# Altium PCB PCB3.PcbDoc
Units mm, origin at the board's own origin, x right, y up, seen from the top; angles counter-clockwise.
Board outline 36.2 x 47.87 mm, 2 copper layers (Top Layer, Bottom Layer); 21 components, 17 nets, 72 pads, 18 vias.
Unrouted connection lines stored in the file: 1.
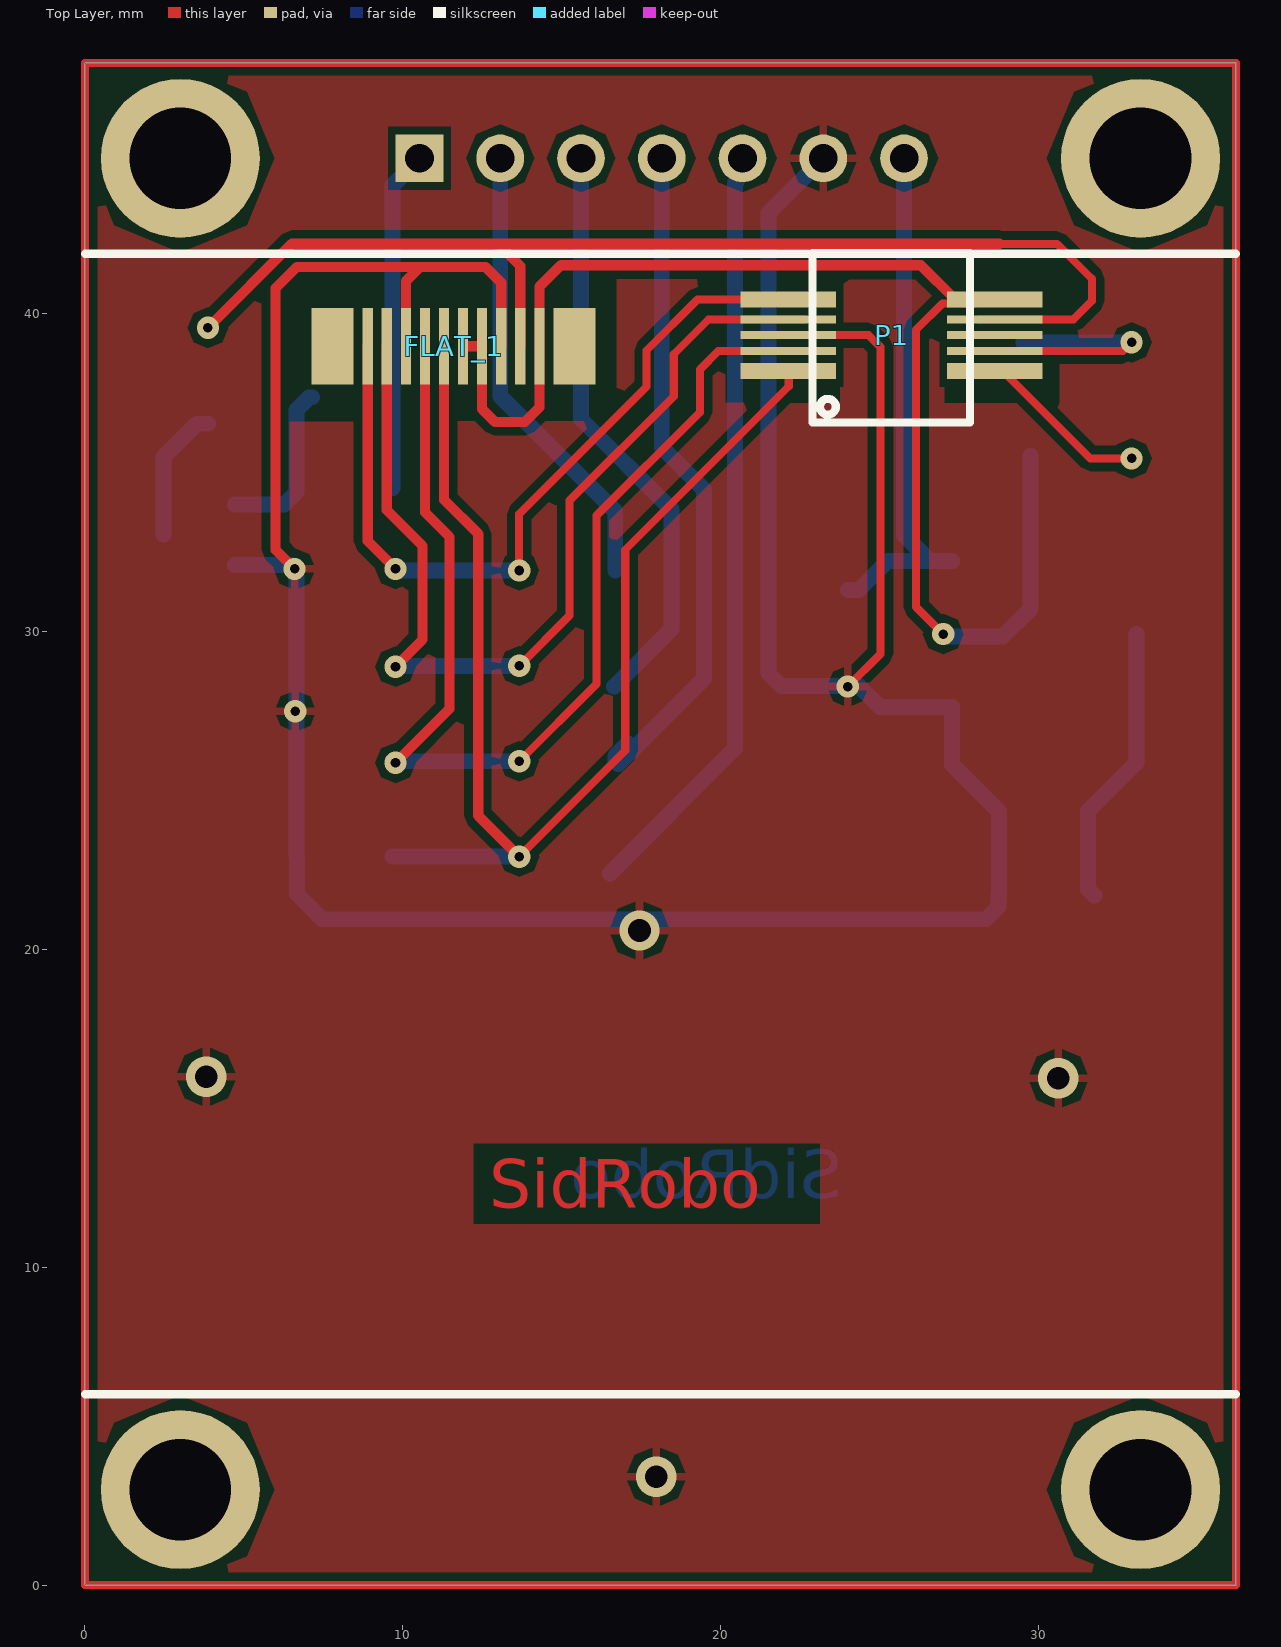
[diagram p0: Top Layer view]
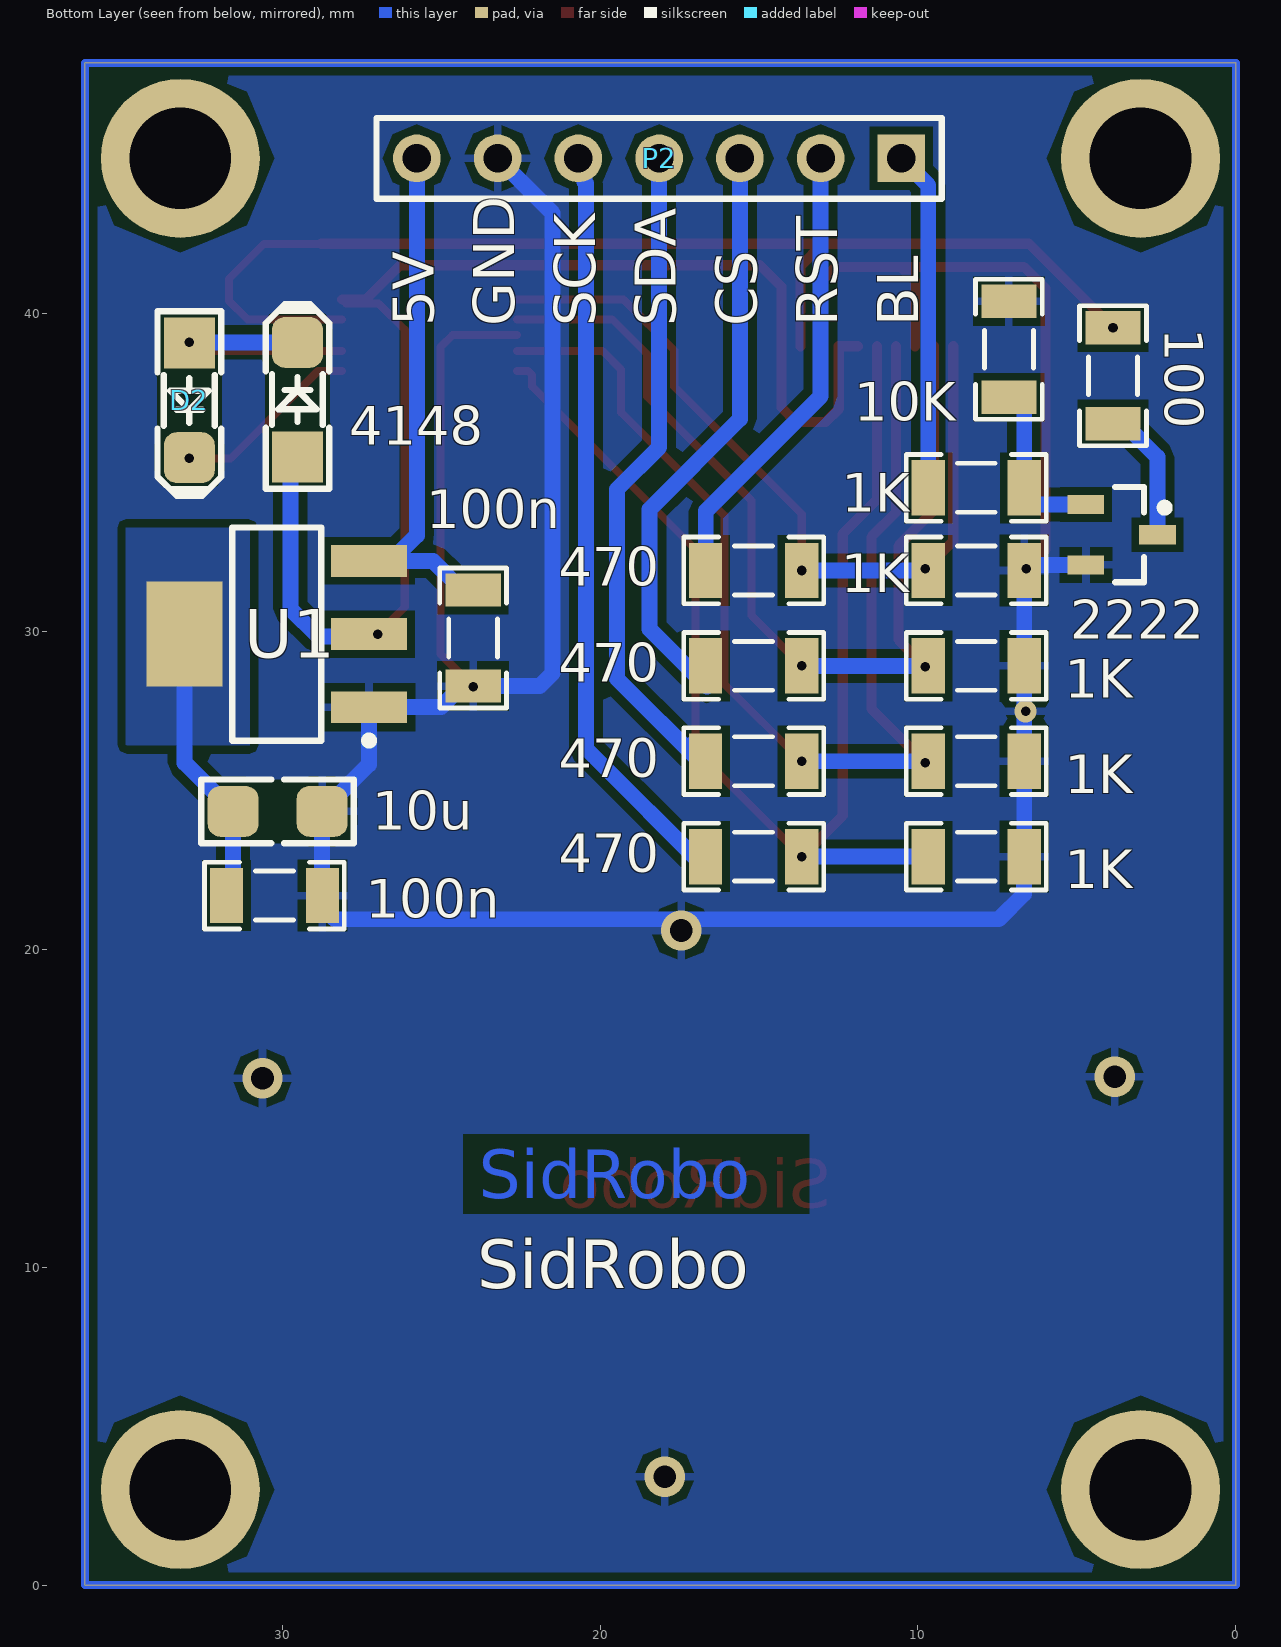
[diagram p1: Bottom Layer view, seen from below]
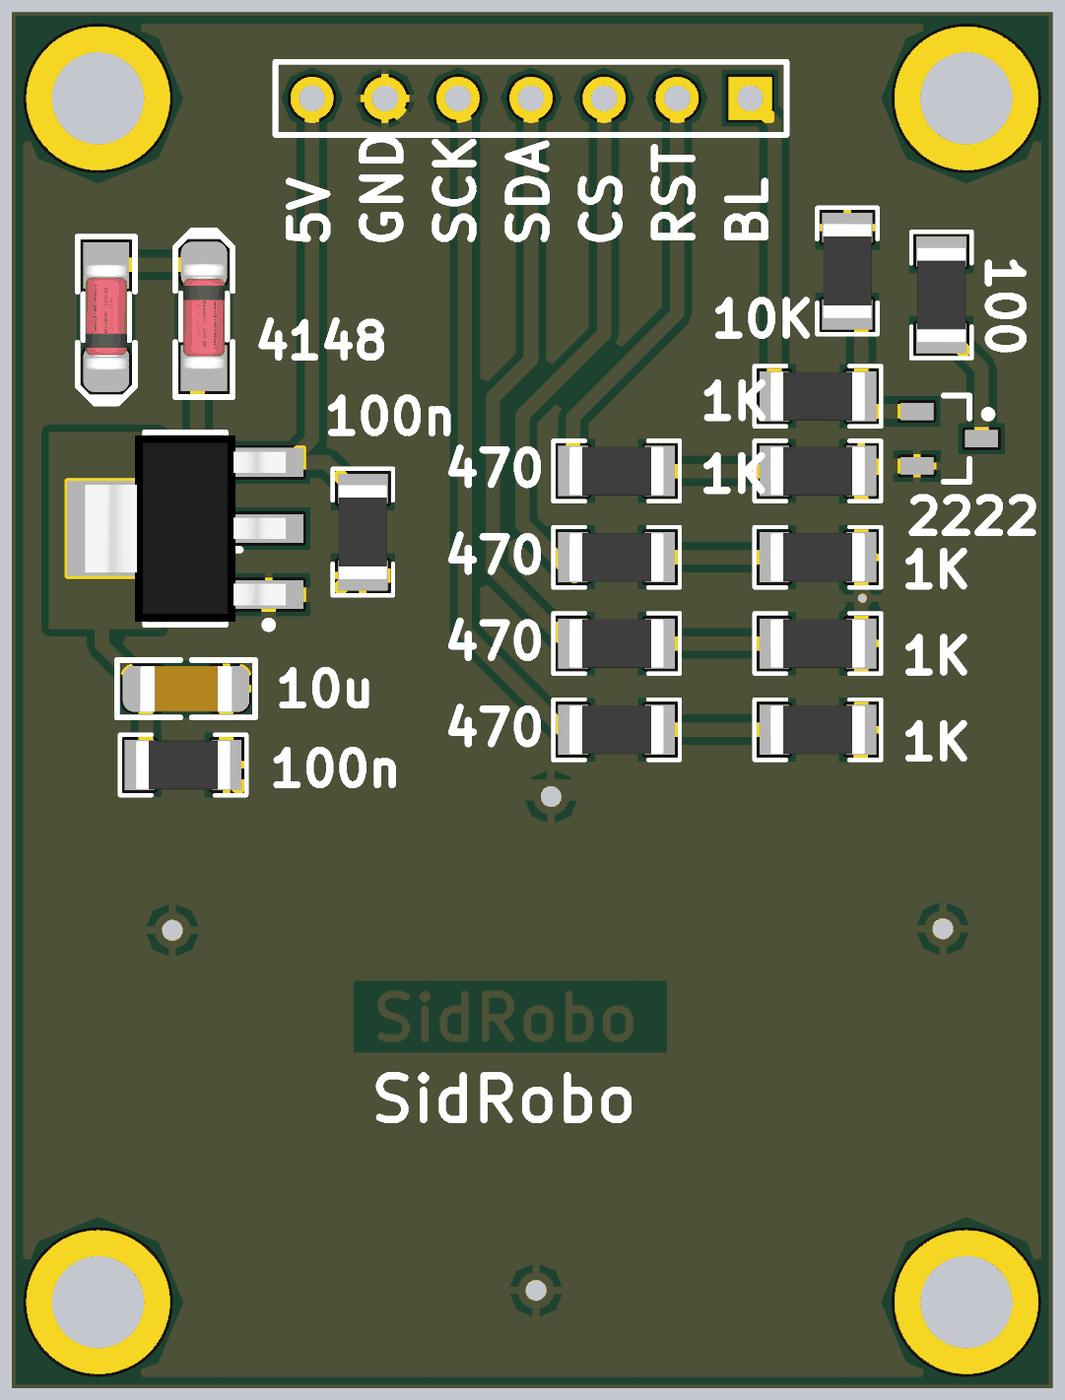
[diagram p2: 3D render of the assembled board from below, using the file's embedded part models]

## Layer stack, top to bottom
Top Solder: solder mask 0.0102, Solder Resist, Dk 3.5
Top Layer: signal copper 0.0356
Dielectric 1: dielectric 0.32, FR-4, Dk 4.8
Bottom Layer: signal copper 0.0356
Bottom Solder: solder mask 0.0102, Solder Resist, Dk 3.5

## Board outline
0,6 0,47.871 36.2,47.871 36.2,0 0,0

## Design rules (kind name [scope] priority, off if disabled: settings)
Clearance [All] p1: gap=0.24 ignorepadtopadclearanceinfootprint=FALSE
ComponentClearance [All] p1: gap=0.25 collisioncheckmode=3 verticalgap=0 showdistances=TRUE
PolygonConnect [All] p1: connectstyle=Relief reliefconductorwidth=0.254 reliefentries=4 polygonreliefangle="90 Angle" airgapwidth=0.254
RoutingVias [All] p1: holewidth=0.711 width=1.27 viastyle="Through Hole" minholewidth=0.711 minwidth=1.27 maxholewidth=0.711 maxwidth=1.27
SolderMaskExpansion [All] p1: expansion=0.102 istentingtop=FALSE
Width [All] p1: maxlimit=0.6 minlimit=0.254 preferedwidth=0.32
29 further rules are at their usual default settings.

## Classes and differential pairs
component class Sheet2: 1K 10u 100 100n 470 2222 4148 D2 P1 P2 U1

## Components (designator, comment, footprint, x,y, rotation, side; value= is the part's Value field where it differs from the comment)
1K "1k" IND1206 8.167,34.51 r180 bottom (schematic designator R10)
1K "1k" IND1206 8.167,31.909 r0 bottom (schematic designator R4)
1K "1k" IND1206 8.167,28.909 r0 bottom (schematic designator R3)
1K "1k" IND1206 8.167,25.909 r0 bottom (schematic designator R2)
1K "1k" IND1206 8.167,22.909 r0 bottom (schematic designator R1)
10K "1k" IND1206 7.14,38.867 r270 bottom (schematic designator R10)
10u "Cap" C1206 30.142,24.335 r0 bottom value=10uF (schematic designator C3)
100 "100" IND1206 3.867,38.034 r90 bottom (schematic designator R8)
100n "Cap" IND1206 30.242,21.684 r0 bottom value=100nF (schematic designator C2)
100n "Cap" IND1206 23.992,29.784 r90 bottom value=100nF (schematic designator C1)
470 "470" IND1206 15.167,31.909 r180 bottom (schematic designator R9)
470 "470" IND1206 15.167,28.909 r180 bottom (schematic designator R7)
470 "470" IND1206 15.167,25.91 r180 bottom (schematic designator R6)
470 "470" IND1206 15.167,22.909 r180 bottom (schematic designator R5)
2222 "2N2222A" SOT23_N 3.592,33.034 r180 bottom (schematic designator Q1)
4148 "1N4148" D_SOD80 29.517,37.284 r90 bottom (schematic designator D1)
D2 "1N4148" D_SOD80 32.917,37.259 r270 bottom
FLAT_1 "1202" 1202_LCD 1.406,36.865 r0 top (schematic designator FLAT)
P1 "1200" 1200_1100_LCD 21.617,41.059 r0 top
P2 "Header 7" HDR1X7 10.522,44.872 r0 bottom
U1 "LM1117IMP-x.x" MP04A_N 30.167,29.909 r0 bottom

## Footprints (in the part's own frame and the unit in brackets; to place one, negate y for a bottom-side part, rotate by r counter-clockwise, add the part's x,y. Pads: shape width x height; smd on the part's side, far side on the other; paste and mask are expansions set on the pad)
1200_1100_LCD [mm]
  rect 3x0.5 smd: 1(0.5,-2.875) 5(0.5,-0.625) 6(7,-0.625) 10(7,-2.875)
  rect 3x0.254 smd: 2(0.5,-2.25) 3(0.5,-1.75) 4(0.5,-1.25) 7(7,-1.25) 8(7,-1.75) 9(7,-2.25)
  silkscreen extent 1.27,-4.5 6.22,0.83
1202_LCD [mm]
  rect 1.32x2.4 smd: 1(6.386,2.094) 12(13.986,2.094)
  rect 0.32x2.4 smd: 2(7.486,2.094) 3(8.086,2.094) 4(8.686,2.094) 5(9.286,2.094) 6(9.886,2.094) 7(10.486,2.094) 8(11.086,2.094) 9(11.686,2.094) 10(12.286,2.094) 11(12.886,2.094)
C1206 [mm] "CHIP Capacitor, 3.2X1.6mm, 1206"
  rrect50% 1.6x1.6 smd mask+0.075: 1(-1.4,0) 2(1.4,0)
  Top Layer pour cut-out: -0.8,1 -0.8,-1 0.8,-1 0.8,1
  silkscreen extent -2.4,-1 2.4,1, body extent -1.6,-0.8 1.6,0.8, height 1
D_SOD80 [mm] "SOD-80 MINI-MELF 3.6X1.6mm, LL-34, LL4148"
  rect 1.6x1.6 smd: 1(-1.8,0)
  rrect50% 1.6x1.6 smd: 2(1.8,0)
  Top Layer pour cut-out: -1.016,1.016 1.016,1.016 1.016,-1.016 -1.016,-1.016
  silkscreen extent -2.8,-1 3,1, body extent -1.85,-0.8 1.85,0.8, height 2
HDR1X7 [mm] "Connector; Header; 7 Position"
  rect 1.5x1.5 hole 0.9: 1(0,0)
  round 1.5 hole 0.9: 2(2.54,0) 3(5.08,0) 4(7.62,0) 5(10.16,0) 6(12.7,0) 7(15.24,0)
  silkscreen extent -1.27,-1.27 16.51,1.27
IND1206 [mm] "Chip Inductor, 2-Leads, Body 3/20x1/60mm, IPC Medium Density DESIGNER:ABBAS BASEREH"
  rect 1.04x1.74 smd: 1(-1.51,0) 2(1.51,0)
  silkscreen extent -2.2,-1.05 2.2,1.05, body extent -1.65,-0.85 1.65,0.85, height 0.94
MP04A_N [mm] "SOT223, 4-Leads, Body 6.5x3.5mm, Pitch 2.3mm, Lead Span 7mm, IPC Medium Density"
  rect 2.4x1 smd: 1(-2.9,2.3) 2(-2.9,0) 3(-2.9,-2.3)
  rect 2.4x3.3 smd: 4(2.9,0)
  silkscreen extent -3.02,-3.35 1.4,3.47, body extent -3.49,-3.24 3.49,3.24, height 1.64
SOT23_N [mm] "SOT23, 3-Leads, Body 2.9x1.3mm, Pitch 0.95mm, Lead Span 2.3mm - Reverse Pinning, IPC Medium Density"
  rect 1.15x0.6 smd: 1(1.125,0) 2(-1.125,-0.95) 3(-1.125,0.95)
  silkscreen extent -0.2,-1.5 1.47,1.5, body extent -0.7,-1.5 0.7,1.5, height 1.1

## Part data
1K 1K 1K 1K 1K 10K 100 470 470 470 470: library part Res1, "Resistor", LatestRevisionDate=17-Jul-2002, LatestRevisionNote="Re-released for DXP Platform.", PackageDescription="Axial Device, Thru-Hole; 2 Leads; 0.3 in Pin Spacing", PackageReference=AXIAL-0.3, Published=8-Jun-2000, Publisher="Altium Limited"
10u 100n 100n: "Capacitor", LatestRevisionDate=17-Jul-2002, LatestRevisionNote="Re-released for DXP Platform.", PackageDescription="Radial Cap, Thru-Hole; 2 Leads; 0.3 in Pin Spacing", PackageReference=RAD-0.3, Published=8-Jun-2000, Publisher="Altium Limited"
2222: library part NPN_2N2222A_TO92, "BJT, NPN, 40v, 0.6A, THD, TO92", =http://www.chila.ir, MANF=DIOTEC, MANF_P#=2N2222A, PARAM="0.6A, hFE100~300", PARAM2="40v, 625mW"
4148 D2: library part DIODE_SMD_1N4148, "DIODE, FAST SWTICHING, 0.3A, 0.5W", =http://www.chila.ir, ASSEMBLY=ASSEMBLY, DESC=DESCRIPTION, MANF=MANF, MANF_P#=1N4148, PARAM=75V, PARAM2="300mA, 0.5W", PRICE=PRICE
FLAT_1: library part "Header 12", "Header, 12-Pin", LatestRevisionDate=17-Jul-2002, LatestRevisionNote="Re-released for DXP Platform.", Publisher="Altium Limited"
P1: library part "Header 10", "Header, 10-Pin", LatestRevisionDate=17-Jul-2002, LatestRevisionNote="Re-released for DXP Platform.", Publisher="Altium Limited"
P2: "Header, 7-Pin", LatestRevisionDate=17-Jul-2002, LatestRevisionNote="Re-released for DXP Platform.", Publisher="Altium Limited"
U1: "x.x Volt, 800mA Low-Dropout Linear Regulator, 4-pin SOT-223", Manufacturer="National Semiconductor", PackageTopMarking=XYTT*N05B, PartNumber=LM1117IMP-3.3, PowerWise=N, Supplier Part Number 1=7614123, Code_IPC=SOT223-4, Code_JEDEC=TO-261-AA, ComponentLink1Description="LM1117 Datasheet", ComponentLink1URL=http://www.national.com/ds/LM/LM1117.pdf, ComponentLink2Description="LM1117 Web Page", ComponentLink2URL=http://www.national.com/pf/LM/LM1117.html, ComponentLink3Description="MP04A Package Page", ComponentLink3URL=http://www.national.com/packaging/folders/mp04a.html, CompType="LDO IC", DatasheetVersion=Apr-2006, PackageDescription="Molded SOT-223, 6.50 x 3.56 x 1.6mm Body, 4 Lead, 2.3mm Pitch", PackageReference=MP04A, PackageVersion="revB, Apr-2003", PinCount=4, Published=4-Dec-2008, Publisher="Altium Limited", RoHS=N, Supplier 1=Farnell

## Free pads (board coordinates)
  round 5 hole 3.2: 1(3,44.872) 2(33.2,44.872) 3(3,3) 4(33.2,3)

## Via types
v1: diameter 0.7, hole 0.3, Top Layer to Bottom Layer, tented top, 13 vias
v2: diameter 1.27, hole 0.711, Top Layer to Bottom Layer, tented both sides, 4 vias
v3: diameter 0.7, hole 0.3, Top Layer to Bottom Layer, tented both sides, 1 vias

## Nets (pads, with @x,y where several pads share a name; then routed paths per layer and width w, separated by ;. In a path a pad name is that pad's centre, name@x,y a point inside that pad or via, vN(x,y) a via of type N, cw(c..) or ccw(c..) an arc to the next point about the centre after c; other vN are vias at no path point)
5V: 100n.2@23.992,31.294 P2.7 U1.3 | length 16.6
  Bottom Layer w0.5: 100n.2@23.992,31.294 24.342,31.294 25.257,32.209 U1.3@26.567,32.209 ; P2.7 25.762,33.015 U1.3@26.567,32.209 ; U1.3 U1.3@26.567,32.209
+2.5V: D2.2 P1.10 | length 5.9
  Top Layer w0.254: P1.10@28.117,38.184 28.867,38.184 31.617,35.434 v1(32.917,35.434)
+2.8V: 4148.2 D2.1 P1.9 | length 8.3
  Top Layer w0.254: P1.9@28.117,38.809 32.642,38.809 v1(32.917,39.084)
  Bottom Layer w0.5: 4148.2 v1(32.917,39.084)
BL: 1K.1@9.677,34.51 P2.1 | length 10.7
  Bottom Layer w0.5: 1K.1@9.677,34.51 9.677,44.026 P2.1
CS: 1K.2@9.677,28.909 470.2@13.657,28.909 FLAT_1.3 P1.4 | length 31.2
  Top Layer w0.254: v1(13.657,28.909) 15.242,30.494 15.242,34.109 18.517,37.384 18.517,38.709 19.617,39.809 P1.4@22.617,39.809
  Top Layer w0.32: FLAT_1.3 9.492,33.809 10.617,32.685 10.617,29.734 v1(9.767,28.884)
  Bottom Layer w0.5: 1K.2@9.677,28.909 v1(13.657,28.909)
GND: 1K.1@6.657,22.909 1K.1@6.657,25.909 1K.1@6.657,28.909 1K.1@6.657,31.909 10K.1 10u.1 100n.1 2222.2 FLAT_1.4 FLAT_1.9 P1.3 P2.6 U1.1 | length 99.7
  Top Layer w0.254: P1.3@22.617,39.309 24.642,39.309 25.017,38.934 25.017,29.285 v1(23.992,28.259)
  Top Layer w0.32: v1(6.592,31.959) 5.992,32.56 5.992,40.785 6.667,41.46 10.542,41.46 ; FLAT_1.4 10.092,41.01 10.542,41.46 ; FLAT_1.9 13.092,40.959 12.592,41.46 10.542,41.46
  Bottom Layer w0.5: 2222.2 6.467,32.085 v1(6.592,31.959) ; 1K.1@6.657,31.909 6.657,28.91 6.657,25.909 6.657,22.909 6.667,22.899 6.667,21.735 7.46,20.941 28.339,20.941 28.732,21.334 28.732,21.684 28.742,21.694 10u.1 27.267,25.81 U1.1 25.007,27.609 24.342,28.275 23.992,28.275 21.902,28.275 21.492,28.684 21.492,43.141 P2.6
  other v2: 17.967,3.41 30.617,15.934 3.817,15.984 17.442,20.585
  other v3: 6.617,27.484
LED+: 10u.2 100n.2@31.752,21.684 4148.1 FLAT_1.7 FLAT_1.8 FLAT_1.11 P1.6 U1.2 U1.4 | length 52.1
  Top Layer w0.254: v1(26.992,29.909) 26.142,30.759 26.142,39.481 26.973,40.311 P1.6@27.994,40.311
  Top Layer w0.32: FLAT_1.7 FLAT_1.8 12.492,36.984 12.892,36.584 13.842,36.584 14.292,37.035 FLAT_1.11 14.292,40.835 14.967,41.51 26.292,41.51 27.367,40.434 P1.6@28.117,40.434
  Bottom Layer w0.5: v1(26.992,29.909) 27.067,29.834 28.867,29.834 29.742,30.709 4148.1@29.742,35.51 ; 100n.2@31.752,21.684 31.542,21.894 10u.2 33.067,25.86 U1.4
LED-: 100.2 FLAT_1.10 P1.7 | length 37.4
  Top Layer w0.254: P1.7@28.117,39.809 P1.7 31.092,39.809 31.667,40.384 31.667,41.085 30.567,42.185 28.767,42.185
  Top Layer w0.32: v1(3.867,39.544) 6.507,42.185 12.992,42.185 ; FLAT_1.10 13.692,41.485 12.992,42.185 ; 28.767,42.185 12.992,42.185
NetP2_2: 470.1@16.677,31.909 P2.2 | length 14.5
  Bottom Layer w0.5: P2.2 13.062,37.389 16.677,33.775 470.1@16.677,31.909
NetP2_3: 470.1@16.677,28.909 P2.3 | length 18.5
  Bottom Layer w0.5: P2.3 15.602,36.675 18.442,33.835 18.442,30.06 470.1@16.642,28.26
NetP2_4: 470.1@16.677,25.91 P2.4 | length 21.4
  Bottom Layer w0.5: 470.1@16.677,25.91 16.677,26.079 470.1@17.07,26.472 ; 470.1@16.772,25.815 19.467,28.51 19.467,34.46 18.142,35.785 P2.4
NetP2_5: 470.1@16.677,22.909 P2.5 | length 24.2
  Bottom Layer w0.5: 470.1@16.517,22.384 20.442,26.309 20.442,44.079 20.491,44.127 20.491,44.68 P2.5
NetQ1_2: 1K.2@6.657,34.51 10K.2 2222.3 | length 5.3
  Bottom Layer w0.5: 2222.3 6.264,33.984 6.657,34.378 6.657,34.51 6.657,36.964 7.05,37.357 10K.2
NetQ1_3: 100.1 2222.1 | length 4.3
  Bottom Layer w0.5: 2222.1 2.467,35.474 3.517,36.524 100.1
RST: 1K.2@9.677,31.909 470.2@13.657,31.909 FLAT_1.2 P1.5 | length 25.5
  Top Layer w0.254: v1(13.657,31.909) 13.657,33.684 17.667,37.695 17.667,38.834 19.267,40.434 P1.5@22.617,40.434
  Top Layer w0.32: FLAT_1.2 8.892,32.834 v1(9.767,31.959)
  Bottom Layer w0.5: 1K.2@9.677,31.909 v1(13.657,31.909)
SCK: 1K.2@9.677,22.909 470.2@13.657,22.909 FLAT_1.6 P1.1 | length 40.2
  Top Layer w0.254: v1(13.657,22.909) 16.992,26.244 16.992,32.559 22.135,37.702 22.135,38.061 22.258,38.184 P1.1@22.617,38.184
  Top Layer w0.32: FLAT_1.6 11.292,34.134 12.367,33.059 12.367,24.199 v1(13.657,22.909)
  Bottom Layer w0.5: 1K.2@9.677,22.909 v1(13.657,22.909)
SDA: 1K.2@9.677,25.909 470.2@13.657,25.91 FLAT_1.5 P1.2 | length 36.3
  Top Layer w0.254: v1(13.657,25.91) 16.092,28.345 16.092,33.634 19.342,36.885 19.342,38.235 19.917,38.809 P1.2 P1.2@22.617,38.809
  Top Layer w0.32: v1(9.767,25.859) 11.467,27.559 11.467,32.968 10.692,33.743 FLAT_1.5
  Bottom Layer w0.5: 1K.2@9.677,25.909 v1(13.657,25.91)
pads on no net: FLAT_1.1 FLAT_1.12 P1.8

## Polygon pours and split planes (outlines as drawn)
GND on Bottom Layer "GND" (solid, pour order 4): 36.2,47.871 0,47.871 0,0 36.2,0
LED+ on Bottom Layer "LED+" (solid, pour order 1): 34.917,33.259 34.917,26.434 34.892,26.41 31.017,26.41 31.017,33.234 31.042,33.259
GND on Top Layer "GND" (solid, pour order 6): 36.2,47.871 36.2,0 0,0 0,47.871

## Other copper
Top Layer:
  pour cut-out: 20.142,37.185 20.142,41.422 23.742,41.422 23.742,37.184
  pour cut-out: 27.042,37.185 27.042,41.422 30.642,41.422 30.642,37.185
  pour cut-out: 6.342,41.184 16.732,41.184 16.732,36.909 17.032,36.61 6.342,36.61
  text "SidRobo" at 12.721,11.863 h1.52
Bottom Layer:
  text "SidRobo" at 23.813,12.163 h1.52
Multi-Layer:
  lines w0.254: 0,0 36.2,0 36.2,6 36.2,41.871 36.2,47.871 0,47.871 0,41.871 0,6 0,0

## Silkscreen, mask and mechanical layers (free items; w line width, h text height)
Top Overlay:
  lines w0.254: 0,6 36.2,6 ; 0,41.871 36.2,41.871 ; 36.192,41.871 36.2,41.871 ; 36.192,41.871 36.2,41.871 ; 36.192,41.871 36.2,41.871
Bottom Overlay:
  text "BL" at 9.994,39.585 h1.3 r270
  text "RST" at 12.534,39.585 h1.3 r270
  text "CS" at 15.074,39.585 h1.3 r270
  text "SDA" at 17.614,39.585 h1.3 r270
  text "SCK" at 20.154,39.585 h1.3 r270
  text "GND" at 22.694,39.585 h1.3 r270
  text "5V" at 25.234,39.585 h1.3 r270
  text "SidRobo" at 23.863,9.339 h1.52